# Altium PCB TivaC.PcbDoc (part 3 of 3)
Units mil, origin at the board's own origin, x right, y up, seen from the top; angles counter-clockwise.
Board outline 2000 x 2600 mil, 6 copper layers (L1, L2(GND), L3, L4, L5(PWR), L6), stack 61.068 mil thick; 95 components, 90 nets, 380 pads, 190 vias.
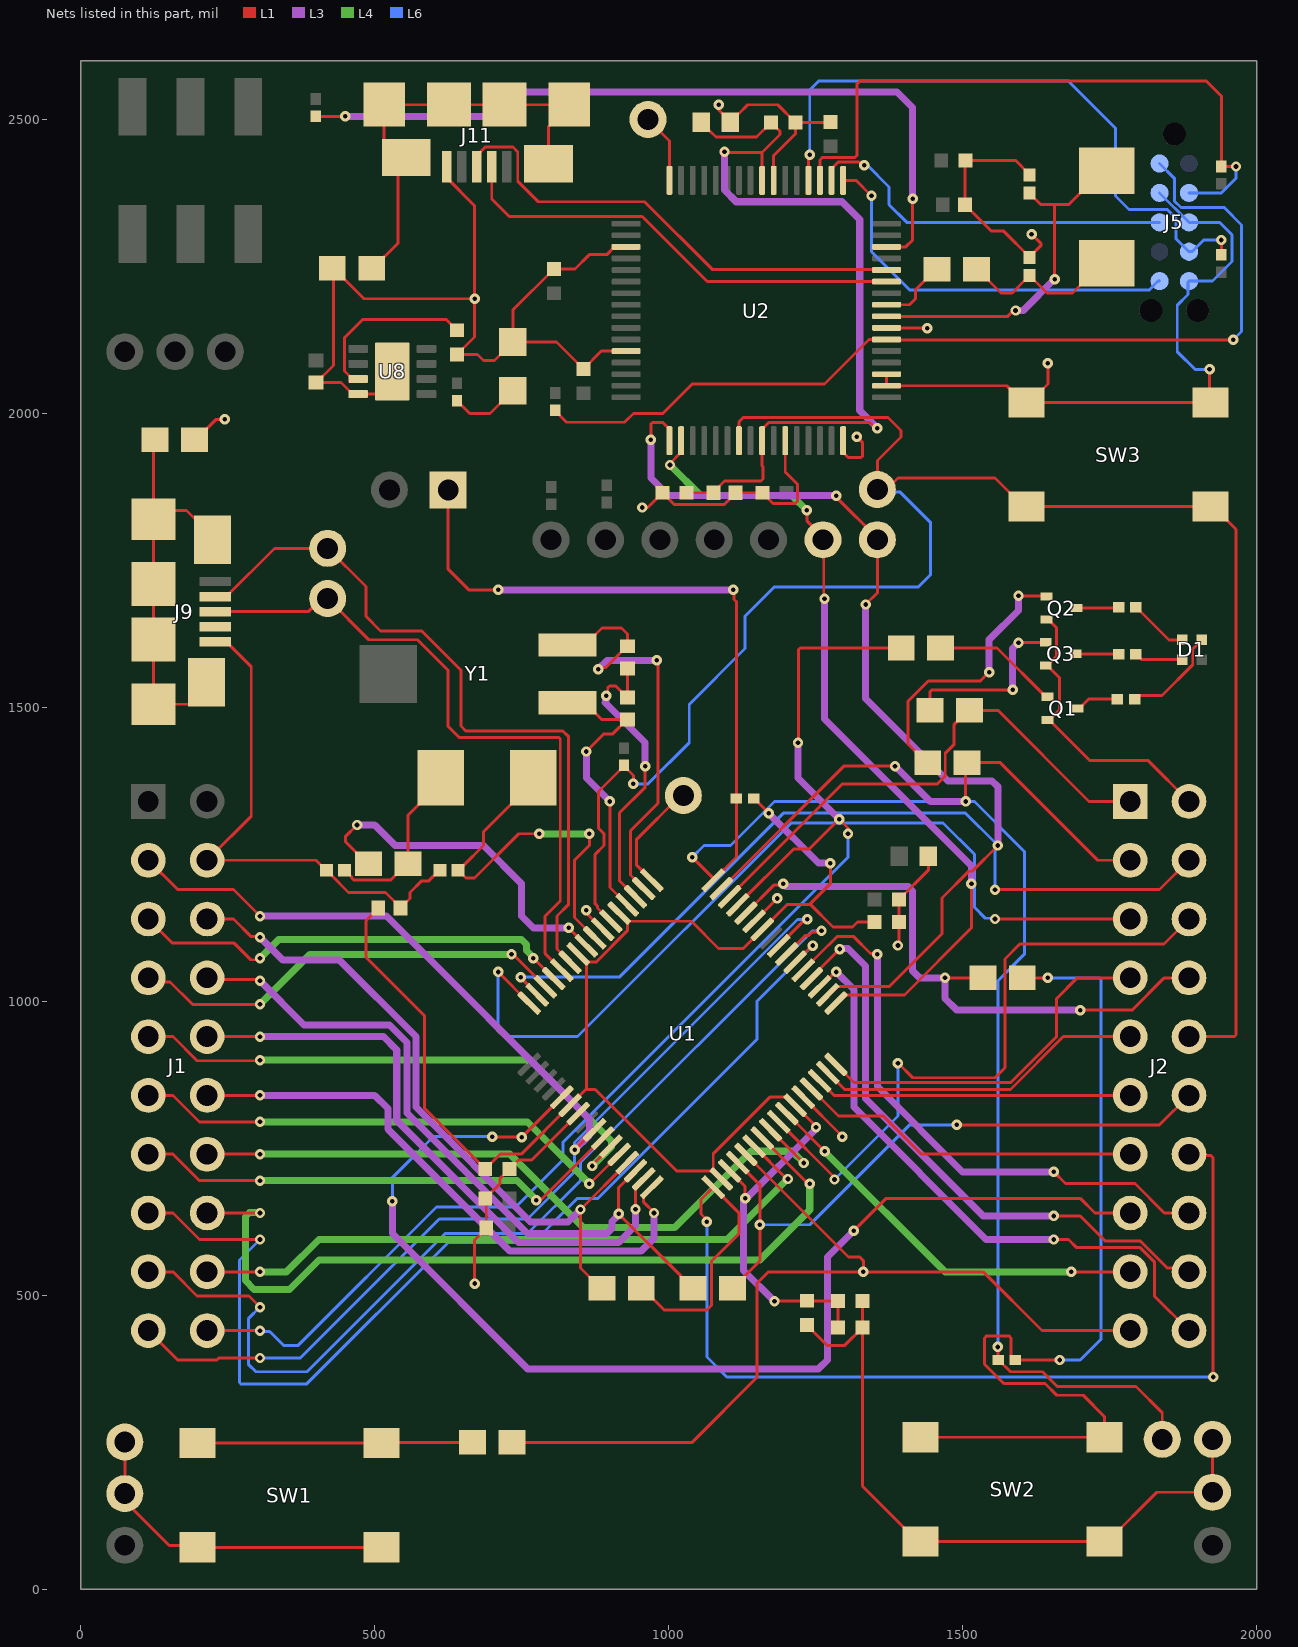
[diagram p6: the nets of this part, all layers, seen from the top]

## Via types
v1: diameter 17.72, hole 7.87, L1 to L3, 65 vias
v2: diameter 17.72, hole 7.87, L1 to L4, 60 vias
v3: diameter 17.72, hole 7.87, L4 to L6, 29 vias
v4: diameter 17.72, hole 7.87, L1 to L2(GND), 15 vias
v5: diameter 17.72, hole 7.87, L1 to L6, 14 vias
v6: diameter 17.72, hole 7.87, L1 to L5(PWR), 6 vias
v7: diameter 17.72, hole 7.87, L3 to L6, 1 vias

## Nets (pads, with @x,y where several pads share a name; then routed paths per layer and width w, separated by ;. In a path a pad name is that pad's centre, name@x,y a point inside that pad or via, vN(x,y) a via of type N, cw(c..) or ccw(c..) an arc to the next point about the centre after c; other vN are vias at no path point) (continued)
GND: *.2 C1.2 C2.2 C3.2 C4.2 C5.2 C6.2 C7.2 C8.2 C9.2 C10.2 C11.2 C12.2 C14.2 C15.2 C17.2 C18.2 C19.2 C20.2 C21.2 C22.2 C24.2 C25.2 C26.2 C31.2 C32.2 D4.1 H10.1 H11.1 H12.1 H13.1 J1.4 J2.2 J5.3 J5.5 J5.9 J9.5 J11.5 Q1.2 Q2.2 Q3.2 R14.2 R16.2 SW1.3 SW1.4 SW2.3 SW2.4 SW3.3 SW3.4 U1.3 U1.12 U1.27 U1.39 U1.55 U2.3 U2.12 U2.27 U2.32 U2.34 U2.35 U2.39 U2.55 U8.4 U8.9 | length 8158.9
  L1 w5: H12.1@75,250.44 75,150 150.7,74.3 195.62,74.3 SW1.3@198.5,71.42 SW1.4@511.5,71.42 ; R14.2@193.5,1955 195.36,1955 230.36,1990 v4(245,1990) ; J9.5@228.86,1611.57 247.56,1611.57 290,1569.13 290,1315 220,1245 225,1240 400.04,1240 417.04,1223 C31.2@417.83,1223 418.62,1223 426.36,1215.26 426.36,1214.33 455.69,1185 518.48,1185 C7.2@543.9,1159.58 ; C14.2@400,2052.44 C14.2@400.79,2052.44 ; U8.9@530,2071.34 530,2059.98 502.97,2032.95 U8.4@471.93,2032.95 462.09,2032.95 442.6,2052.44 C14.2@400.79,2052.44 ; C7.2@543.9,1158.79 C7.2@543.9,1159.58 ; C32.2@610.83,1223 610.04,1223 592.04,1205 580,1205 560,1185 560,1175 553.89,1168.89 553.21,1168.89 C7.2@543.9,1159.58 ; J11.5@622.38,2419.68 622.38,2400.98 670,2353.36 v4(670,2195) ; v4(670,520) 670,593.69 689.76,613.45 C12.2@689.76,614.24 689.76,663.14 C10.2@687.99,664.92 713.37,690.3 713.37,698.97 720.02,705.62 C4.2@729.33,714.93 744.4,730 766.98,730 U1.55@846.15,809.17 ; v4(860,1155) 860,1150.26 U1.39@887.91,1122.35 ; U2.12@927.66,2106.1 885.43,2106.1 C20.2@855,2075.67 809.33,2121.34 D4.1@735,2121.34 ; U2.3@927.66,2283.27 907.98,2283.27 894.71,2270 865,2270 840.67,2245.67 C15.2@805,2245.67 735,2175.67 D4.1@735,2121.34 ; v4(955,1840) 964.33,1840 *.2@989.33,1865 1009.33,1845 1094.56,1845 1113.77,1864.21 C2.2@1113.77,1865 C17.2@1159.33,1865 1177.64,1846.69 1215.17,1846.69 1218.98,1850.5 1218.98,1879.5 1198.33,1900.15 U2.27@1198.33,1953.54 ; v4(1085,2525) 1085,2516.57 C9.2@1104.61,2496.97 ; U1.3@1103.66,711.73 1130,685.39 v4(1130,665) ; C9.2@1104.61,2485 C9.2@1104.61,2486.97 ; C9.2@1104.61,2495 C9.2@1104.61,2496.97 ; U1.27@1145.42,1136.27 1146.27,1136.27 1146.27,1136.7 1184.57,1175 v4(1185,1175) ; U2.55@1178.65,2396.46 1178.65,2438.65 1215.67,2475.67 C24.2@1215.67,2495 ; U1.12@1228.93,837.01 1295,770.94 v4(1295,770) ; C6.2@1235,449.33 1269.33,415 1299.67,415 C5.2@1329.67,445 ; C19.2@1275,2495.67 1274.33,2495 C24.2@1215.67,2495 ; U2.32@1296.76,1953.54 1296.76,1933.86 1305.62,1925 1327.07,1925 1330,1927.93 1330,1950 v4(1320,1960) ; C8.2@1329.67,490 C5.2@1329.67,445 ; U2.35@1370.58,2066.73 U2.34@1370.58,2047.05 1575.12,2047.05 1603.58,2018.58 SW3.4@1608.5,2018.58 SW3.4@1613.43,2018.58 ; U2.39@1370.58,2145.47 1439.53,2145.47 v4(1440,2145) ; v4(1390,1095) 1391.67,1096.67 C3.2@1391.67,1135 C11.2@1391.67,1173 1441.61,1222.94 C22.2@1441.61,1247 ; C26.2@1613.93,2265.35 C26.2@1613.93,2266.14 ; C25.2@1613.93,2405.71 1613.93,2406.5 1590.42,2430 C21.2@1505,2430 1503.9,2428.9 C1.2@1503.9,2355 1503.9,2354.21 1513.21,2344.9 1514,2344.9 1548.9,2310 1570.07,2310 C26.2@1613.93,2266.14 ; v4(1617.21,2305) 1632.93,2289.29 1632.93,2285.14 C26.2@1613.93,2266.14 ; Q3.2@1641.51,1571.31 Q3.2@1644.5,1571.31 ; Q2.2@1642.51,1649.31 1645.5,1649.31 1660,1634.81 1660,1586.81 Q3.2@1644.5,1571.31 ; Q1.2@1644.51,1478.51 Q1.2@1647.5,1478.51 ; v4(1645,2085) 1645,2050.16 SW3.4@1613.43,2018.58 ; J2.2@1885,1340 1815,1410 1716.01,1410 Q1.2@1647.5,1478.51 ; v3(1920,2075) 1920,2020.08 SW3.3@1921.5,2018.58 SW3.4@1613.43,2018.58 ; H13.1@1925,255 H10.1@1925,165 1830,165 1746.42,81.42 SW2.4@1741.5,81.42 SW2.3@1428.5,81.42 1423.58,81.42 1329.67,175.33 C5.2@1329.67,445 ; C14.2@400.79,2052.44 430,2081.65 430,2244.93 R16.2@428.01,2246.92 429.87,2246.92 481.79,2195 v4(670,2195) ; v4(670,2195) 670,2130 C18.2@640,2100 675,2100 685,2090 703.66,2090 D4.1@735,2121.34 ; C9.2@1104.61,2496.97 1116.87,2509.23 1118.84,2509.23 1134.61,2525 1185.67,2525 C24.2@1215.67,2495 ; Q3.2@1644.5,1571.31 1649.01,1566.81 1649.01,1565.99 1665,1550 1665,1496.01 Q1.2@1647.5,1478.51
  L6 w5: J5.9@1835,2375 J5.3@1885,2325 1937.07,2325 1958.36,2303.71 1958.36,2258.36 1925,2225 J5.5@1885,2225 1883.12,2223.12 1883.12,2202.01 1865,2183.89 1865,2105 1895,2075 v3(1920,2075)
  other v2: 1920,2075
HIB: H1.1 U1.33 | length 191.1
  L1 w5: U1.33@971.42,1205.87 945,1232.3 945,1275 1020,1350 H1.1@1025,1350
ICDI_RST: J5.10 R19.2 U2.38 | length 1627.5
  L1 w5: R19.2@807.02,2005.24 807.02,2004.25 826.27,1985 925,1985 940,2000 990,2000 1040,2050 1265,2050 1340.79,2125.79 U2.38@1370.58,2125.79 1371.36,2125 v3(1960,2125)
  L6 w5: J5.10@1835,2425 1860,2400 1860,2361.31 1871.31,2350 1945,2350 1974.5,2320.5 1974.5,2139.5 v3(1960,2125)
  other v2: 1960,2125
ICDI_TCK: J5.4 R21.2 U2.52 | length 1102.2
  L1 w5: U2.52@1237.7,2396.46 1237.7,2437.7 v2(1240,2440) ; R21.2@1940,2269.76 v2(1940,2295)
  L6 w5: v2(1240,2440) 1240,2550 1255,2565 1680,2565 1760,2485 1760,2370 1783.01,2346.99 1848.01,2346.99 1863.01,2331.99 1863.01,2296.99 J5.4@1885,2275 1890,2275 1910,2295 v2(1940,2295)
  other v3: 1940,2295 1240,2440
ICDI_TDI: J5.8 U2.50 | length 642.8
  L1 w5: U2.50@1277.07,2396.46 1277.07,2416.14 1288.49,2427.56 1324,2427.56 1329.33,2422.23 v3(1332.62,2422.23)
  L6 w5: v3(1332.62,2422.23) 1333.12,2422.73 1337.27,2422.73 1375,2385 1375,2355 1405,2325 J5.8@1835,2325
  other v2: 1332.62,2422.23
ICDI_TDO: J5.6 U2.49 | length 677.3
  L1 w5: U2.49@1296.76,2396.46 1318.54,2396.46 v3(1345,2370)
  L6 w5: v3(1345,2370) 1345,2275 1409.99,2210.01 1817.47,2210.01 1832.46,2225 J5.6@1835,2225
  other v2: 1345,2370
ICDI_TMS: J5.2 R22.2 U2.51 | length 1109.5
  L1 w5: U2.51@1257.39,2396.46 1257.39,2430.87 1262.08,2435.56 1317.07,2435.56 1320,2438.49 1320,2560 1325,2565 1915,2565 1940,2540 R22.2@1940,2420 v3(1965,2420)
  L6 w5: J5.2@1885,2375 1940,2375 1965,2400 v3(1965,2420)
  other v2: 1965,2420
LED_B: Q3.1 R11.2 | length 304.4
  L1 w5: R11.2@1444.5,1495 1444.5,1526.57 1447.43,1529.5 1584.5,1529.5 v1(1585,1530) ; v1(1595,1610) 1595.34,1610.34 1641.17,1610.34 Q3.1@1641.51,1610.68
  L3 w12: v1(1585,1530) 1585,1600 v1(1595,1610)
LED_G: Q2.1 R12.2 | length 476.6
  L1 w5: R12.2@1440.5,1406 1438.64,1406 1407.07,1437.57 1407.07,1510.44 1441.64,1545 1530,1545 v1(1545,1560) ; v1(1595,1690) 1595.66,1689.34 1641.85,1689.34 Q2.1@1642.51,1688.68
  L3 w12: v1(1545,1560) 1545,1615 1595,1665 v1(1595,1690)
LED_R: Q1.1 R2.2 | length 216.4
  L1 w5: R2.2@1462.5,1601 1558.4,1601 1641.52,1517.88 Q1.1@1644.51,1517.88
NetC2_1: *.1 C2.1 C9.1 C24.1 U2.25 U2.56 | length 1438.2
  L1 w5: *.1@1030.67,1865 C2.1@1075.98,1865 1075.98,1865.79 1095.19,1885 1156.71,1885 1160.29,1888.58 1160.29,1909.34 1158.96,1910.67 1158.96,1973.23 1170.38,1984.65 1342.02,1984.65 1352.18,1974.49 v1(1355,1974.49) ; C9.1@1055.39,2483.03 C9.1@1055.39,2485 ; C9.1@1055.39,2495 1055.39,2493.03 1067.66,2480.77 1069.63,2480.77 1080.39,2470 1149.33,2470 C24.1@1174.33,2495 1189.33,2480 1189.33,2474.33 1158.96,2443.96 ; v1(1095,2445) 1096.04,2443.96 1158.96,2443.96 ; U2.56@1158.96,2396.46 1158.96,2443.96
  L3 w12: v1(1095,2445) 1095,2380 1115,2360 1295,2360 1325,2330 1325,2005 1355,1975 v1(1355,1974.49)
NetC3_1: C3.1 C4.1 C5.1 C6.1 C7.1 C8.1 R31.1 U1.2 U1.11 U1.26 U1.37 U1.42 U1.54 | length 2963.4
  L1 w5: C7.1@506.1,1158.79 506.1,1158 485,1136.9 485,1075 585,975 585,817.92 C4.1@687.99,714.93 713.07,740 749.14,740 U1.54@832.23,823.09 859.14,850 ; U1.42@846.15,1080.6 U1.42@860.07,1066.68 ; U1.37@915.75,1150.19 U1.37@929.67,1136.27 ; U1.2@1089.74,697.81 U1.2@1075.82,711.73 ; R31.1@1144.76,1345 1145.75,1345 1170,1320.75 v1(1170,1320) ; v1(1180,490) 1234.33,490 C6.1@1235,490.67 1287.66,490.67 C8.1@1288.33,490 1288.33,446.67 1290,445 C5.1@1288.33,445 ; v1(1250.61,785.61) 1250,786.22 1250,788.1 U1.11@1215.01,823.09 1201.09,837.01 1172.01,837.01 1075.82,740.82 U1.2@1075.82,711.73 ; v1(1275,1235) 1275,1200 1240,1165 ; C3.1@1350.33,1135 1320.96,1135 1312.6,1126.64 1279.32,1126.64 1240.96,1165 1240,1165 ; 859.14,850 860.07,850.93 U1.42@860.07,1066.68 ; 859.14,850 875,850 1013.27,711.73 U1.2@1075.82,711.73 ; U1.42@860.07,1066.68 876.22,1066.68 929.67,1120.12 U1.37@929.67,1136.27 ; U1.37@929.67,1136.27 1038.73,1136.27 1085,1090 1126.98,1090 U1.26@1159.34,1122.35 1201.98,1165 1240,1165
  L3 w12: v1(1170,1320) 1255,1235 v1(1275,1235) ; v1(1180,490) 1127.55,542.45 1127.55,660 1250.61,783.06 v1(1250.61,785.61)
NetC18_1: C18.1 U8.3 | length 297.5
  L1 w5: U8.3@471.93,2058.54 462.09,2058.54 448.7,2071.93 448.7,2128.7 480,2160 621.34,2160 C18.1@640,2141.34
NetC25_1: C25.1 U2.40 Y5.2 | length 602.8
  L1 w5: U2.40@1370.58,2165.16 1576.72,2165.16 1586.56,2175 v1(1590,2175) ; C25.1@1613.93,2375 1613.93,2374.21 1633.14,2355 1656.53,2355 ; v1(1656.53,2228.47) 1656.53,2355 ; Y5.2@1745,2412.73 1737.13,2412.73 1700.26,2375.86 1700.26,2375.33 1679.92,2355 1656.53,2355
  L3 w12: v1(1590,2175) 1603.06,2175 v1(1656.53,2228.47)
NetC26_1: C26.1 R20.2 Y5.1 | length 283.6
  L1 w5: R20.2@1523.5,2245 1525.36,2245 1565.36,2205 1584.28,2205 1605.4,2226.12 1606.19,2226.12 C26.1@1613.93,2233.86 ; C26.1@1613.93,2234.65 C26.1@1613.93,2233.86 ; Y5.1@1745,2255.25 1737.13,2255.25 1686.88,2205 1643.57,2205 1622.45,2226.12 1621.66,2226.12 C26.1@1613.93,2233.86
NetC28_1: C28.1 U1.36 Y1.1 | length 495.1
  L1 w5: Y1.1@828.12,1507.79 857.65,1507.79 886.11,1479.32 C28.1@929.21,1479.32 ; v1(860,1425) 890,1455 904.89,1455 C28.1@929.21,1479.32 ; v1(900,1340) 900,1193.78 U1.36@929.67,1164.11 ; C28.1@930,1479.32 C28.1@929.21,1479.32
  L3 w12: v1(860,1425) 860,1380 v1(900,1340)
NetC28_2: C28.2 C29.1 U1.35 | length 506.3
  L1 w5: v1(894.06,1520) 896.36,1522.3 896.36,1533.43 899.29,1536.36 909.97,1536.36 929.21,1517.12 C28.2@930,1517.12 C29.1@930,1566.1 ; U1.35@943.59,1178.03 916.62,1205 916.62,1320.66 960,1364.04 v1(960,1400)
  L3 w12: v1(894.06,1520) 892.97,1518.91 892.97,1508.97 892,1508 960,1440 v1(960,1400)
NetC29_2: C29.2 U1.34 Y1.2 | length 714.3
  L1 w5: Y1.2@842.88,1606.21 857.65,1606.21 886.43,1635 920,1635 930,1625 C29.2@930,1603.9 929.21,1603.9 892.75,1567.43 882.43,1567.43 v1(880,1565) ; U1.34@957.5,1191.95 957.5,1192.35 935,1214.85 935,1290 982,1337 982,1578 v1(980,1580)
  L3 w12: v1(880,1565) 895,1580 v1(980,1580)
NetC31_1: C31.1 R26.2 Y2.1 | length 304.1
  L1 w5: C31.1@448.54,1223 455,1216.54 455.79,1216.54 460.42,1211.91 460.42,1210.4 464.23,1206.59 527.42,1206.59 554.83,1234 R26.2@556.68,1234 556.68,1316.55 612.26,1372.13 Y2.1@612.26,1380 ; Y2.1@612.26,1401.13 Y2.1@612.26,1409
NetC32_1: C32.1 U1.40 Y2.2 | length 672.4
  L1 w5: Y2.2@769.74,1380 769.74,1372.13 732.87,1335.26 731.74,1335.26 685,1288.52 685,1265 650.74,1230.74 649.28,1230.74 C32.1@641.54,1223 642.33,1223 655.33,1210 670,1210 745,1285 v2(780,1285) ; v2(864.84,1284.9) 865,1284.75 865,1265 840,1240 840,1142.42 U1.40@873.99,1108.44
  L4 w12: v2(780,1285) v2(780,1285) 864.79,1284.95 v2(864.84,1284.9)
NetD1_2: D1.2 R3.2 | length 171.5
  L1 w5: R3.2@1792.76,1514 1799.12,1520.36 1839.27,1520.36 1891.37,1572.47 1891.37,1599.37 D1.2@1906.73,1614.73
NetD1_3: D1.3 R5.2 | length 101.4
  L1 w5: R5.2@1794.76,1670 1795.75,1670 1851.02,1614.73 D1.3@1873.27,1614.73
NetD1_4: D1.4 R4.2 | length 82.1
  L1 w5: R4.2@1794.76,1590 1795.75,1590 1804.48,1581.27 D1.4@1873.27,1581.27
NetD4_2: D4.2 R27.1 | length 120.6
  L1 w5: R27.1@640,2021.81 640,2020.83 646.36,2014.47 647.34,2014.47 661.81,2000 696.34,2000 D4.2@735,2038.66
NetH15_1: H15.1 U2.64 | length 118.7
  L1 w5: H15.1@965,2500 1001.48,2463.52 U2.64@1001.48,2396.46
NetJ9_4: J9.4
NetJ9_S1: J9.S1 J9.S2 J9.S3 J9.S4 J9.S5 J9.S6 R14.1 | length 692.5
  L1 w5: R14.1@126.5,1955 123.54,1952.04 J9.S3@123.54,1820.24 ; J9.S2@213.54,1542.76 213.54,1534.27 184.55,1505.28 J9.S6@123.54,1505.28 J9.S5@123.54,1615.51 J9.S4@123.54,1710 J9.S3@123.54,1820.24 ; J9.S1@223.9,1784.8 223.9,1791.24 180.14,1835 138.31,1835 J9.S3@123.54,1820.24
NetJ11_2: J11.2 U2.43 | length 784.5
  L1 w5: J11.2@699.15,2419.68 699.15,2364.89 729.04,2335 955,2335 1065.79,2224.21 U2.43@1370.58,2224.21
NetJ11_3: J11.3 U2.44 | length 837.5
  L1 w5: J11.3@673.56,2419.68 673.56,2438.39 688.1,2452.93 735.14,2452.93 743.36,2444.71 743.36,2394.87 778.22,2360 959.11,2360 1074.11,2245 1369.47,2245 U2.44@1370.58,2243.9
NetJ11_S1: J11.S1 J11.S2 J11.S3 J11.S4 J11.S5 J11.S6 R16.1 | length 753.9
  L1 w5: R16.1@495.01,2246.92 496.87,2246.92 540,2290.05 540,2421.44 J11.S2@553.56,2435 545.07,2435 516.08,2464 J11.S6@516.08,2525 J11.S5@626.31,2525 J11.S4@720.8,2525 J11.S3@831.04,2525 831.04,2523.03 795.61,2487.6 J11.S1@795.61,2424.65
NetQ1_3: Q1.3 R3.1 | length 74.3
  L1 w5: Q1.3@1695.49,1498.19 1698.48,1498.19 1714.29,1514 R3.1@1763.24,1514
NetQ2_3: Q2.3 R5.1 | length 72.2
  L1 w5: Q2.3@1693.49,1669 1764.24,1669 R5.1@1765.24,1670
NetQ3_3: Q3.3 R4.1 | length 73.2
  L1 w5: Q3.3@1692.49,1591 1764.24,1591 R4.1@1765.24,1590
NetR20_1: R20.1 U2.41 | length 119.8
  L1 w5: U2.41@1370.58,2184.84 1409.84,2184.84 1420,2195 1420,2210.36 1454.64,2245 R20.1@1456.5,2245
NetR24_2: R24.2 U2.46 | length 1317.3
  L1 w5: R24.2@400,2505.24 v1(450.24,2505.24) ; U2.46@1370.58,2283.27 1403.27,2283.27 1415,2295 v1(1415,2365)
  L3 w12: v1(450.24,2505.24) 697.39,2505.24 738.65,2546.5 1388.5,2546.5 1415,2520 v1(1415,2365)
NetR26_1: R26.1 U1.41 | length 599.5
  L1 w5: v1(470,1300) 450,1280 450,1271.83 487.83,1234 R26.1@489.69,1234 ; v1(830,1125) 830,1124.58 U1.41@860.07,1094.52
  L3 w12: v1(470,1300) 500,1300 535,1265 685,1265 750,1200 750,1145 770,1125 v1(830,1125)
nWAKE: H21.1 H24/25.1 R8.2 R31.2 U1.32 | length 3086.2
  L1 w5: H24/25.1@625,1870 625,1735 660,1700 v1(710,1700) ; v5(1040,1245) 1075.82,1209.18 U1.32@1075.82,1205.87 1115.24,1245.29 R31.2@1115.24,1345 1115.24,1679.76 1111.36,1683.64 1111.36,1698.64 v1(1110,1700) ; v2(1560,412.18) 1560.24,411.95 R8.2@1560.24,390 1561.22,390 1581.22,370 1635.75,370 1660.75,345 1795,345 1839.56,300.44 H21.1@1839.56,255
  L3 w12: v1(710,1700) v1(1110,1700)
  L6 w5: v5(1040,1245) 1060,1265 1105,1265 1180,1340 1520,1340 1605,1255 1605,1080 1560,1035 v2(1560,412.18)
  other v3: 1560,412.18
PA0/U0RX_VCP_TXD: P1.1 U1.17 U2.18 | length 1424.2
  L1 w5: v2(1002.31,1912.2) 1002.31,1915 1021.17,1933.86 U2.18@1021.17,1953.54 ; v2(1235,1835) 1235,1817.52 1262.5,1790.02 P1.1@1262.5,1785 1265,1782.5 1263.75,1781.25 1263.75,1686.25 v1(1265,1685) ; U1.17@1284.61,997.08 1298.53,1011 1401,1011 1515,1125 v1(1515,1200)
  L3 w12: v1(1265,1685) 1265,1480 1515,1230 v1(1515,1200)
  L4 w12: v2(1002.31,1912.2) 1054.51,1860 1210,1860 v2(1235,1835)
PA1/U0TX_VCP_RXD: P2.1 U1.18 U2.17 | length 1676.4
  L1 w5: v1(969.71,1955.29) 969.71,1981.78 972.64,1984.71 990,1984.71 1001.48,1973.23 U2.17@1001.48,1953.54 ; U1.18@1270.69,1011 1284.61,1024.92 1374.92,1024.92 1465,1115 1465,1175.96 1510.34,1221.3 1516.3,1221.3 v1(1560,1265) ; v1(1285,1860) 1285,1857.5 1355,1787.5 P2.1@1355,1785 1355,1695 v1(1335,1675)
  L3 w12: v1(969.71,1955.29) 969.71,1890.29 1000,1860 v1(1285,1860) ; v1(1335,1675) 1335,1515 1475,1375 1550,1375 1560,1365 v1(1560,1265)
PA2: J2.20 U1.19 | length 1042.4
  L1 w5: U1.19@1256.77,1024.92 1258.35,1024.92 1283.43,1050 v1(1285,1050) ; v1(1655,595) 1680,595 1693.97,581.03 1801.99,581.03 1826.03,556.99 1826.03,498.97 J2.20@1885,440
  L3 w12: v1(1285,1050) 1315,1020 1315,820 1540,595 v1(1655,595)
PA3: J2.18 U1.20 | length 1024.1
  L1 w5: U1.20@1242.85,1038.84 1242.85,1040.85 1290,1087.99 1290.13,1087.99 v1(1291.07,1088.93) ; v1(1655,635) 1700,635 1742.33,592.67 1801.66,592.67 1847.97,546.36 1878.64,546.36 J2.18@1885,540
  L3 w12: v1(1291.07,1088.93) 1292.14,1090 1305,1090 1335,1060 1335,835 1535,635 v1(1655,635)
PA4: J2.16 U1.21 | length 1006.3
  L1 w5: U1.21@1228.93,1052.76 1255,1078.82 1286.18,1110 1315,1110 1343.43,1081.57 1353.43,1081.57 v1(1355,1080) ; v1(1655,710) 1675,690 1793.02,690 1843.02,640 J2.16@1885,640
  L3 w12: v1(1355,1080) 1355,855 1500,710 v1(1655,710)
PA5: J1.15 U1.22 | length 1831.5
  L1 w5: J1.15@115,640 156.98,640 201.98,595 v5(305,595) ; U1.22@1215.01,1066.68 1215.95,1066.68 1244.16,1094.88 v5(1245.09,1094.88)
  L6 w5: v5(305,595) 270,560 270,351.71 272.93,348.78 383.78,348.78 625,590 770,590 845,665 880,665 1150,935 1150,999.79 v5(1245.09,1094.88)
PA6: J1.17 U1.23 | length 1704.5
  L1 w5: J1.17@115,540 156.98,540 198.01,498.97 286.03,498.97 v5(305,480) ; U1.23@1201.09,1080.6 1232.14,1111.64 1237.6,1111.64 1243.64,1117.68 1257.68,1117.68 v5(1260,1120)
  L6 w5: v5(305,480) 285,460 285,382.93 297.93,370 384.9,370 619.9,605 760,605 850,695 850,725.75 1243.64,1119.39 1259.39,1119.39 v5(1260,1120)
PA7: J1.19 U1.24 | length 1550.2
  L1 w5: J1.19@115,440 165,390 231.6,390 234.96,393.36 v5(305,393.36) ; U1.24@1189.52,1094.52 U1.24@1187.18,1094.52 1232.2,1139.54 v5(1235.46,1139.54)
  L6 w5: v5(305,393.36) 373.36,393.36 610,630 760,630 840,710 840,760 1219.1,1139.1 1235.01,1139.1 v5(1235.46,1139.54)
PB0: J1.5 U1.45 | length 766.6
  L1 w5: J1.5@115,1140 156.03,1098.97 261.03,1098.97 289.25,1070.75 302.57,1070.75 v2(305,1073.18) ; v2(770,1073.23) U1.45@804.39,1038.84
  L4 w12: v2(305,1073.18) 336.82,1105 750,1105 758.49,1096.51 758.49,1086.29 770,1074.78 v2(770,1073.23)
PB1: J1.7 U1.46 | length 752.1
  L1 w5: J1.7@115,1040 122.03,1032.97 152.03,1032.97 190,995 v2(305,995) ; v2(732.7,1080) 735.39,1080 U1.46@790.47,1024.92
  L4 w12: v2(305,995) 390,1080 v2(732.7,1080)
PB2: J2.4 U1.47 | length 1415.3
  L1 w5: v5(748.36,1041.07) 748.36,1040.13 776.55,1011.94 U1.47@776.55,1011 ; v2(1555,1190) 1835,1190 J2.4@1885,1240
  L6 w5: v5(748.36,1041.07) 916.07,1041.07 1195,1320 1505,1320 1555,1270 v2(1555,1190)
  other v3: 1555,1190
PB3: J2.5 U1.48 | length 1524.8
  L1 w5: v5(710,1050) 710,1049.71 U1.48@762.63,997.08 ; v5(1555,1140) J2.5@1785,1140
  L6 w5: v5(710,1050) 710,950 720,940 845,940 1208.36,1303.36 1466.64,1303.36 1520,1250 1520,1160 1538.64,1141.36 1553.64,1141.36 v5(1555,1140)
PB4: J1.13 U1.58 | length 850.3
  L1 w5: J1.13@115,740 156.98,740 201.98,695 v2(305,695) ; v2(775,661.86) 779.14,661.86 780.75,660.25 U1.58@887.91,767.41
  L4 w12: v2(305,695) 741.86,695 v2(775,661.86)
PB5: J1.3 U1.57 | length 1043.3
  L1 w5: J1.3@115,1240 165,1190 260,1190 v1(305,1145) ; v1(840,747.34) U1.57@873.99,781.33
  L3 w12: v1(305,1145) 520,1145 865,800 865,772.34 v1(840,747.34)
PB6: J2.14 R9.1 U1.1 | length 1970
  L1 w5: R9.1@953.5,512 955.36,512 992.36,475 1065,475 1072.5,482.5 1072.5,557.5 1120,605 1120,639.71 U1.1@1075.82,683.89 1055,663.07 1055,638.13 1065,628.13 v3(1065,625) ; J2.14@1885,740 1887.03,737.97 1922.03,737.97 1926.03,733.97 v2(1926.03,361.03)
  L6 w5: v3(1065,625) 1065,395 1098.97,361.03 v2(1926.03,361.03)
  other v2: 1065,625
  other v3: 1926.03,361.03
PB7: J2.12 R10.1 U1.4 | length 1070.6
  L1 w5: R10.1@1108.5,512 1110.36,512 1128.76,530.41 1128.76,532.27 1155,558.5 v5(1155,620) 1155,688.23 U1.4@1117.58,725.65 ; v5(1490,790) 1835,790 J2.12@1885,840
  L6 w5: v5(1155,620) 1240,620 1410,790 v5(1490,790)
PC4: J2.7 U1.16 | length 624.9
  L1 w5: U1.16@1284.61,892.68 1315.3,862 1582,862 1660,940 1660,1005 1695,1040 J2.7@1785,1040
PC5: J2.9 U1.15 | length 563.5
  L1 w5: U1.15@1270.69,878.76 1299.46,850 1581.31,850 1671.31,940 J2.9@1785,940
PC6: J2.11 U1.14 | length 538.5
  L1 w5: U1.14@1256.77,864.85 1281.62,840 J2.11@1785,840
PC7: J2.13 U1.13 | length 592.2
  L1 w5: U1.13@1242.85,850.93 1288.78,805 1365,805 1430,740 1775,740 1780,745 J2.13@1785,740
PD0: J1.6 R9.2 U1.61 | length 1190.2
  L1 w5: J1.6@215,1140 260,1140 290,1110 304.09,1110 v1(305,1109.09) ; R9.2@886.5,512 884.64,512 850,546.64 v1(850,645.99) U1.61@929.67,725.65
  L3 w12: v1(305,1109.09) 344.09,1070 440,1070 570,940 570,820 765,625 829.01,625 v1(850,645.99)
PD1: J1.8 R10.2 U1.62 | length 1251.2
  L1 w5: J1.8@223.36,1048.36 J1.8@215,1040 220,1035 222.43,1037.43 302.57,1037.43 v1(305,1035) ; U1.62@943.59,711.73 915,683.15 v1(915,638.5) 1021.24,532.27 1021.24,530.41 1039.64,512 R10.2@1041.5,512
  L3 w12: v1(305,1035) 380,960 525,960 555,930 555,810 760,605 895,605 903.49,613.49 903.49,625.44 915,636.95 v1(915,638.5)
PD2: J1.10 U1.63 | length 1041
  L1 w5: J1.10@215,940 v1(305,940) ; v1(943.59,646.41) 943.59,683.89 U1.63@957.5,697.81
  L3 w12: v1(305,940) 515,940 537.5,917.5 537.5,797.03 744.53,590 915,590 943.59,618.59 v1(943.59,646.41)
PD3: J1.12 U1.64 | length 999.3
  L1 w5: J1.12@215,840 v1(305,840) ; U1.64@971.42,683.89 957.5,669.97 957.5,658.46 975,640.96 v1(975,640)
  L3 w12: v1(305,840) 500,840 522.5,817.5 522.5,782.5 730,575 952.97,575 975,597.03 v1(975,640)
PD6: J2.15 U1.53 | length 2024.4
  L1 w5: v3(700,770) 700.65,769.35 749.35,769.35 v1(750,768.7) U1.53@818.31,837.01 ; v1(1315,610) 1370,665 1700,665 1725,640 J2.15@1785,640
  L3 w12: v7(530,660) 530,605 760,375 1255,375 1270,390 1270,565 v1(1315,610)
  L6 w5: v7(530,660) 530,700 600,770 v3(700,770)
  other v2: 700,770
PD7: J2.17 U1.10 | length 695.6
  L1 w5: U1.10@1201.09,809.17 1265.26,745 v2(1265.26,744.74) ; v2(1685,540) J2.17@1785,540
  L4 w12: v2(1265.26,744.74) 1470,540 v2(1685,540)
PE0: J2.6 U1.9 | length 1105.7
  L1 w5: U1.9@1187.18,795.25 1282.04,700.38 v3(1282.04,697.04) ; v2(1390,895) 1415,870 1555,870 1572.23,887.23 1572.23,1072.23 1597.33,1097.33 1842.33,1097.33 J2.6@1885,1140
  L6 w5: v3(1282.04,697.04) 1390,805 v2(1390,895)
  other v2: 1282.04,697.04
  other v3: 1390,895
PE1: J1.14 U1.8 | length 1209.1
  L1 w5: J1.14@215,740 v2(305,740) ; U1.8@1173.26,781.33 1173.67,781.33 1173.67,781.12 1229.79,725 v2(1230,725)
  L4 w12: v2(305,740) 730,740 855,615 1010,615 1140,745 1210,745 v2(1230,725)
PE2: J1.16 U1.7 | length 1407.3
  L1 w5: J1.16@215,640 v2(305,640) ; U1.7@1159.34,767.41 1236.75,690 v2(1240,690)
  L4 w12: v2(305,640) 303.91,641.09 287.03,641.09 280,634.06 280,525 295,510 355,510 405,560 1155,560 1240,645 v2(1240,690)
PE3: J1.18 U1.6 | length 1133.8
  L1 w5: J1.18@215,540 v2(305,540) ; U1.6@1145.42,753.49 1198.91,700 1200.78,700 v2(1202.89,697.89)
  L4 w12: v2(305,540) 350,540 405,595 1099.09,595 1201.98,697.89 v2(1202.89,697.89)
PE4: J1.9 U1.59 | length 964.5
  L1 w5: J1.9@115,940 156.98,940 198.01,898.97 303.97,898.97 v2(305,900) ; v2(870,720) 870,721.66 U1.59@901.83,753.49
  L4 w12: v2(305,900) 765,900 902.53,762.47 902.53,752.53 v2(870,720)
PE5: J1.11 U1.60 | length 883.4
  L1 w5: J1.11@115,840 156.98,840 201.98,795 v2(305,795) ; v2(865,690) 866.18,690 U1.60@915.75,739.57
  L4 w12: v2(305,795) 760,795 v2(865,690)
PF0: J2.8 R1.1 U1.28 | length 1050.6
  L1 w5: U1.28@1131.5,1150.19 1178.87,1197.57 1192.57,1197.57 v1(1195,1200) ; v1(1470,1040) R1.1@1534.5,1040 ; v1(1700,985) 1788.02,985 1843.02,1040 J2.8@1885,1040
  L3 w12: v1(1195,1200) 1200,1195 1407.97,1195 1415,1187.97 1415,1062.03 ; 1414.97,1062 1414.97,1052.06 1427.03,1040 v1(1470,1040) 1470,1005 1490,985 v1(1700,985)
PF1: J1.20 R2.1 U1.29 | length 2259
  L1 w5: J1.20@215,440 v5(305,440) ; U1.29@1117.58,1164.15 1212.21,1258.78 1238.78,1258.78 v1(1290,1310) 1305,1295 v3(1305,1285) ; v1(1220,1440) 1221,1441 1221,1598.07 1223.93,1601 R2.1@1395.5,1601
  L3 w12: v1(1220,1440) 1220,1380 v1(1290,1310)
  L6 w5: v5(305,440) 306.36,438.64 321.36,438.64 345,415 370,415 605,650 740,650 820,730 820,760 1305,1245 v3(1305,1285)
  other v2: 1305,1285
PF2: J2.1 R11.1 U1.30 | length 919.4
  L1 w5: U1.30@1103.66,1178.03 1295.63,1370 1457.37,1370 1470.48,1383.11 1470.48,1421.85 1485,1436.37 1485,1470.36 1509.64,1495 R11.1@1511.5,1495 1560,1495 1715,1340 J2.1@1785,1340
PF3: J2.3 R12.1 U1.31 | length 939.6
  L1 w5: U1.31@1089.74,1191.95 1297.79,1400 v1(1385,1400) ; v1(1505,1340) 1505,1403.5 R12.1@1507.5,1406 1564,1406 1730,1240 J2.3@1785,1240
  L3 w12: v1(1385,1400) 1445,1340 v1(1505,1340)
PF4: J2.19 R13.1 U1.5 | length 1600.1
  L1 w5: R13.1@733.5,250 1040,250 1150,360 1150,520 1170,540 v2(1331.07,540) ; U1.5@1131.5,739.57 1306.07,565 1325,565 1331.07,558.93 v2(1331.07,540) ; J2.19@1785,440 1635,440 1535,540 v2(1331.07,540)
TARGETRST: H20.1 J2.10 R28.1 SW3.1 SW3.2 U1.38 U2.23 | length 3298.3
  L1 w5: U1.38@901.83,1136.27 879.12,1158.98 879.12,1161.84 875,1165.96 875,1250 890,1265 890,1285 880.48,1294.52 880.48,1356.73 R28.1@924,1400.25 ; R28.1@924,1401.24 R28.1@924,1400.25 ; v2(940,1370) 940,1384.25 R28.1@924,1400.25 ; U2.23@1119.59,1953.54 1119.59,1985.65 1126.79,1992.85 1372.91,1992.85 1395,1970.76 1395,1960 1355,1920 H20.1@1355,1870.44 1370.69,1870.44 1390.25,1890 1555,1890 1603.58,1841.42 SW3.2@1608.5,1841.42 SW3.1@1921.5,1841.42 1926.42,1841.42 1965,1802.83 1965,942.93 1962.07,940 J2.10@1885,940
  L6 w5: v2(940,1370) 965,1370 1035,1440 1035,1505 1130,1600 1130,1655 1180,1705 1425,1705 1445,1725 1445,1815 1394,1866 1359.44,1866 H20.1@1355,1870.44
  other v3: 940,1370
USB_DM: J9.2 P7.1 U1.43 | length 1253.9
  L1 w5: J9.2@228.86,1688.35 247.56,1688.35 329.66,1770.44 P7.1@420,1770.44 485,1705.44 485,1655 510,1630 580,1630 646.69,1563.31 646.69,1468.31 655,1460 820,1460 830,1450 830,1165 810,1145 810,1088.91 U1.43@832.23,1066.68
USB_DP: J9.3 P8.1 U1.44 | length 1166.4
  L1 w5: J9.3@228.86,1662.76 387.1,1662.76 409.34,1685 P8.1@420,1685 490,1615 572.62,1615 625,1562.62 625,1467.37 643.37,1449 812.68,1449 815.61,1446.07 815.61,1170.61 790,1145 790,1081.07 U1.44@818.31,1052.76
USR_SW1: R13.2 SW1.1 SW1.2 | length 468.6
  L1 w5: SW1.1@198.5,248.58 SW1.2@511.5,248.58 512.91,250 R13.2@666.5,250
USR_SW2: R1.2 R8.1 SW2.1 SW2.2 | length 1629.6
  L1 w5: SW2.1@1428.5,258.58 SW2.2@1741.5,258.58 1741.5,293.5 1705,330 1660,330 1640,350 1570,350 1537.07,382.93 1537.07,427.61 1540,430.54 1579.49,430.54 1582.42,427.61 1582.42,396.36 1588.78,390 v3(1665,390) ; R1.2@1601.5,1040 v2(1645,1040)
  L6 w5: v2(1645,1040) 1732.07,1040 1735,1037.07 1735,425 1700,390 v3(1665,390)
  other v2: 1665,390
  other v3: 1645,1040
pads on no net: J5. J5.1 J5.7 J11.4 U2.1 U2.4 U2.5 U2.6 U2.7 U2.8 U2.9 U2.10 U2.13 U2.14 U2.15 U2.16 U2.28 U2.31 U2.33 U2.36 U2.47 U2.48 U2.57 U2.58 U2.59 U2.60 U2.61 U2.62 U2.63 U8.2 U8.6 U8.7 Y1.3

## Polygon pours and split planes (outlines as drawn)
+3.3V on L5(PWR) "+3.3V_L05_P001" (solid, pour order 1): 20,2585 25,2580 25,1225 1130,1225 1235,1330 1980,1330 1995,1345 1990,1350 1990,2590
+MCU_VDDC on L5(PWR) "+MCU_VDDC_L05_P000" (solid, pour order 0): 745,550 720,525 720,465 750,435 830,435 1435,1040 1435,1165 1370,1230 1260,1230 720,690 720,520
GND on L2(GND) "GND_L02_P002" (solid, pour order 2): 10,2590 10,15 15,10 1985,10 1985,2585
no net on L1 "NONET_L01_P003" (solid, pour order 3): 10,2590 10,10 1985,10 1990,15 1990,2590
no net on L6 "NONET_L06_P004" (solid, pour order 4): 15,2585 1985,2585 1985,15 15,15

## Keep-outs
Keep-Out Layer:
  the board outline again, w10

## Other copper
L2(GND):
  region: 450,940
  region: 435,920

## Silkscreen, mask and mechanical layers (free items; w line width, h text height)
Top Overlay:
  lines w10: 410,1730 1965,1730